# Altium PCB myHItachi.PcbDoc
Units mil, origin at the board's own origin, x right, y up, seen from the top; angles counter-clockwise.
Board outline 5511.81 x 4015.75 mil, 2 copper layers (Top Layer, Bottom Layer); 39 components, 47 nets, 150 pads, 0 vias.
Unrouted connection lines stored in the file: 99.
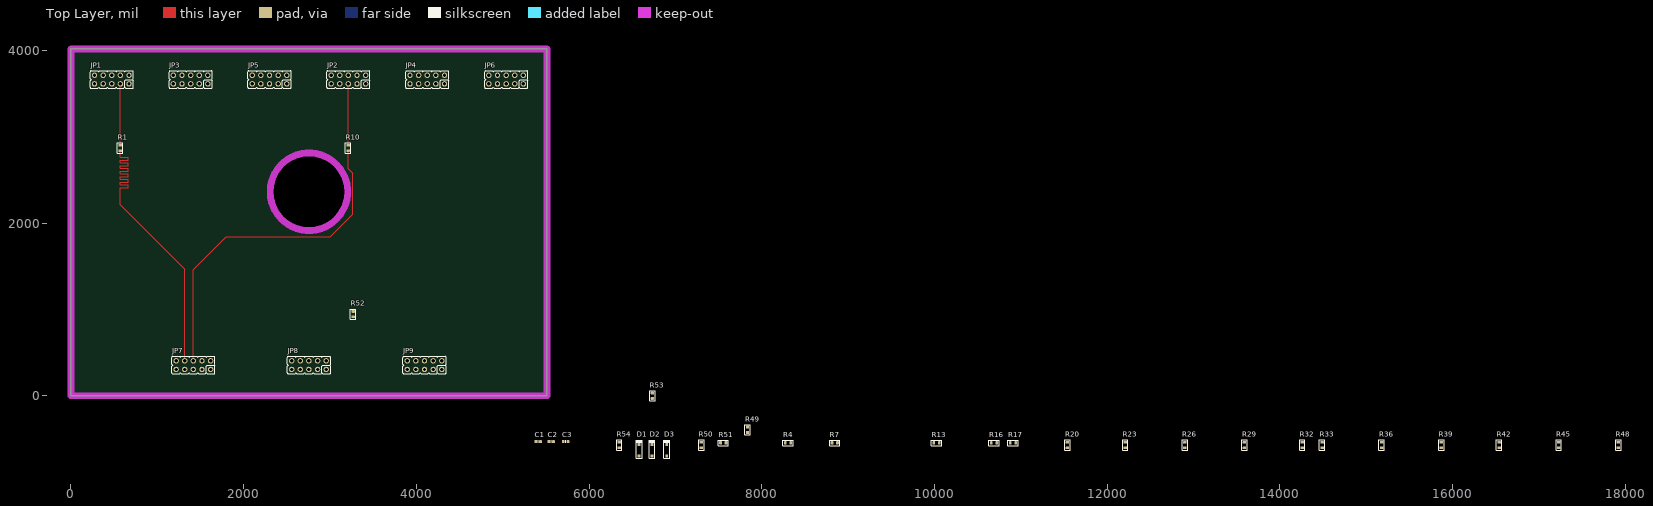
[diagram p0: Top Layer view]
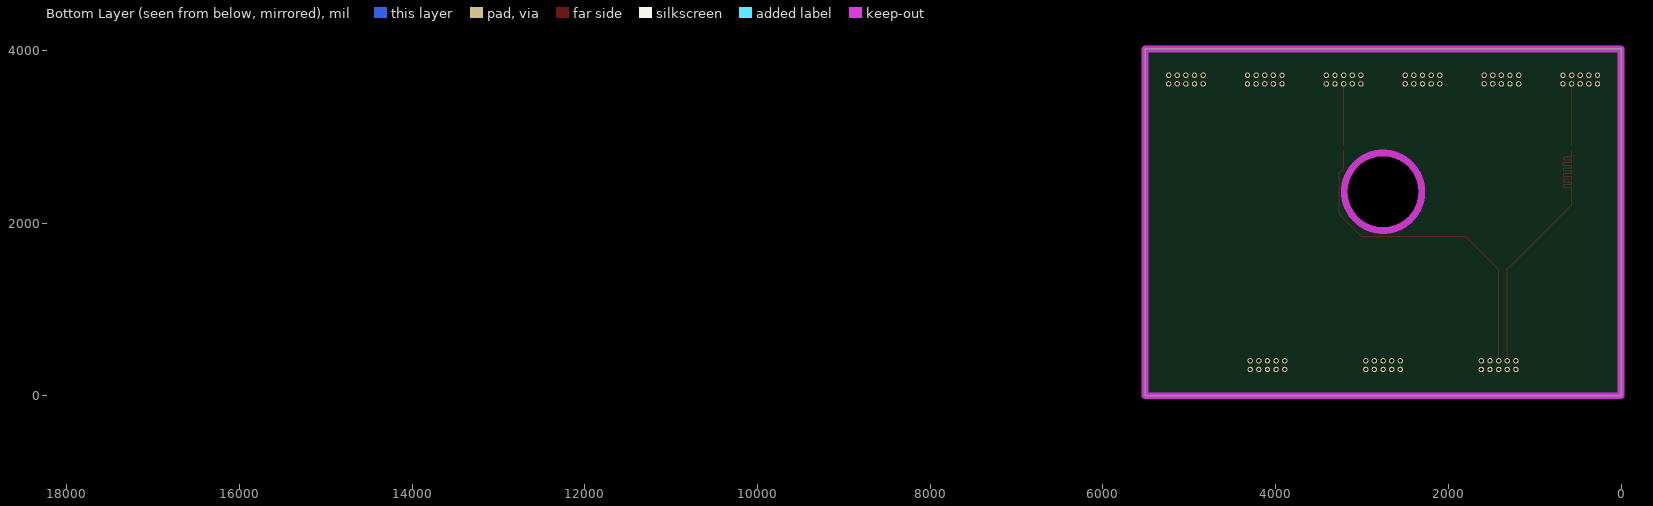
[diagram p1: Bottom Layer view, seen from below]

## Layer stack, top to bottom
Top Solder: solder mask 0.4, Solder Resist, Dk 3.5
Top Layer: signal copper 1.4
Dielectric 1: dielectric 12.6, FR-4, Dk 4.8
Bottom Layer: signal copper 1.4
Bottom Solder: solder mask 0.4, Solder Resist, Dk 3.5

## Board outline
0,0 0,4015.75 5511.81,4015.75 5511.81,0
cut-out: 2307.02,2362.2 ccw(c2755.91,2362.2) 2755.91,1913.32 ccw(c2755.91,2362.2) 3204.79,2362.2 ccw(c2755.91,2362.2) 2755.91,2811.09 ccw(c2755.91,2362.2)

## Design rules (kind name [scope] priority, off if disabled: settings)
Clearance [All] p1: gap=10
MatchedLengths [All] p1: tolerance=78.74 checknetsindiffpair=TRUE checkdiffpairvsdiffpair=TRUE checkothers=TRUE
PolygonConnect [All] p1: connectstyle=Relief reliefconductorwidth=10 reliefentries=4 polygonreliefangle="90 Angle" airgapwidth=10
RoutingVias [All] p1: holewidth=28 width=50 viastyle="Through Hole" minholewidth=28 minwidth=50 maxholewidth=28 maxwidth=50
SolderMaskExpansion [All] p1: expansion=4
Width [All] p1: maxlimit=19.68 minlimit=11.81 preferedwidth=11.81
30 further rules are at their usual default settings.

## Classes and differential pairs
net class P11-P12: P11 P12

## Components (designator, comment, footprint, x,y, rotation, side; value= is the part's Value field where it differs from the comment)
C1 "5AK102KABAA" C0603 5409.69,-531.61 r0 top
C2 "5AK102KABAA" C0603 5559.69,-531.61 r0 top
C3 "5AK102KABAA" C0603 5729.69,-531.61 r0 top
D1 "1N4148_SMD" 1N4148W_V_SMD 6579.69,-631.61 r90 top
D2 "1N4148_SMD" 1N4148W_V_SMD 6729.69,-631.61 r90 top
D3 "1N4148_SMD" 1N4148W_V_SMD 6899.69,-631.61 r90 top
JP1 "SIGNAL OUT 1" HeaderSP_5x2 472.44,3661.42 r180 top
JP2 "SIGNAL OUT 2" HeaderSP_5x2 3212.6,3661.42 r180 top
JP3 "SIGNAL OUT 3" HeaderSP_5x2 1385.83,3661.42 r180 top
JP4 "SIGNAL OUT 4" HeaderSP_5x2 4125.98,3661.42 r180 top
JP5 "SIGNAL OUT 5" HeaderSP_5x2 2299.21,3661.42 r180 top
JP6 "SIGNAL OUT 6" HeaderSP_5x2 5039.37,3661.42 r180 top
JP7 "SIGNAL IN 1" HeaderSP_5x2 1417.32,354.33 r180 top
JP8 "SIGNAL IN 2" HeaderSP_5x2 2755.91,354.33 r180 top
JP9 "SIGNAL IN 3" HeaderSP_5x2 4094.49,354.33 r180 top
R1 "CF1/4W1KJ25" "RM06JTN (0603)" 570,2870 r90 top
R4 "CF1/4W1KJ25" "RM06JTN (0603)" 8304.69,-546.61 r0 top
R7 "CF1/4W1KJ25" "RM06JTN (0603)" 8844.69,-546.61 r0 top
R10 "CF1/4W1KJ25" "RM06JTN (0603)" 3210,2870 r90 top
R13 "CF1/4W1KJ25" "RM06JTN (0603)" 10024.69,-546.61 r0 top
R16 "CF1/4W1KJ25" "RM06JTN (0603)" 10689.69,-546.61 r0 top
R17 "CF1/4W1KJ25" "RM06JTN (0603)" 10909.69,-546.61 r0 top
R20 "CF1/4W1KJ25" "RM06JTN (0603)" 11539.69,-571.61 r90 top
R23 "CF1/4W1KJ25" "RM06JTN (0603)" 12209.69,-571.61 r90 top
R26 "CF1/4W1KJ25" "RM06JTN (0603)" 12899.69,-571.61 r90 top
R29 "CF1/4W1KJ25" "RM06JTN (0603)" 13589.69,-571.61 r90 top
R32 "CF1/4W1KJ25" "RM06JTN (0603)" 14259.69,-571.61 r90 top
R33 "CF1/4W1KJ25" "RM06JTN (0603)" 14489.69,-571.61 r90 top
R36 "CF1/4W1KJ25" "RM06JTN (0603)" 15179.69,-571.61 r90 top
R39 "CF1/4W1KJ25" "RM06JTN (0603)" 15869.69,-571.61 r90 top
R42 "CF1/4W1KJ25" "RM06JTN (0603)" 16539.69,-571.61 r90 top
R45 "CF1/4W1KJ25" "RM06JTN (0603)" 17229.69,-571.61 r90 top
R48 "CF1/4W1KJ25" "RM06JTN (0603)" 17919.69,-571.61 r90 top
R49 "CF1/4W1KJ25" "RM06JTN (0603)" 7834.65,-393.7 r90 top
R50 "CF1/4W1KJ25" "RM06JTN (0603)" 7299.69,-571.61 r90 top
R51 "CF1/4W1KJ25" "RM06JTN (0603)" 7554.69,-546.61 r0 top
R52 "CF1/4W1KJ25" "RM06JTN (0603)" 3267.72,944.88 r90 top
R53 "CF1/4W1KJ25" "RM06JTN (0603)" 6732.28,0 r90 top
R54 "CF1/4W1KJ25" "RM06JTN (0603)" 6349.69,-571.61 r90 top

## Footprints (in the part's own frame and the unit in brackets; to place one, negate y for a bottom-side part, rotate by r counter-clockwise, add the part's x,y. Pads: shape width x height; smd on the part's side, far side on the other; paste and mask are expansions set on the pad)
1N4148W_V_SMD [mm] "SOD-123"
  rrect20% 0.85x0.85 smd mask+0.1: 1(-1.675,0) 2(1.675,0)
  silkscreen extent -2.4,-0.85 3,0.85, body extent -1.85,-0.8 1.85,0.8, height 1.27
C0603 [mm] "Chip Capacitor, Body 1.6x0.8mm, 1608"
  rrect50% 0.8x0.9 smd: 1(-0.7,0) 2(0.7,0)
  silkscreen extent 0,-0.4 0,0.4, body extent -0.8,-0.4 0.8,0.4, height 0.6
HeaderSP_5x2 [mm] "Connector DIP FeMale, 2x5Pin_2.54mm"
  round 1.6 hole 1 mask+0.1: 1(-5.08,1.27) 2(-2.54,1.27) 3(0,1.27) 4(2.54,1.27) 5(5.08,1.27) 6(-5.08,-1.27) 7(-2.54,-1.27) 8(0,-1.27) 9(2.54,-1.27) 10(5.08,-1.27)
  silkscreen extent -6.35,-2.55 6.35,2.55
"RM06JTN (0603)" [mm] "RESISTOR_1/10W_SMD"
  rrect50% 0.8x1 smd mask+0.1: 1(-0.8,0) 2(0.8,0)
  silkscreen extent -1.5,-0.8 1.5,0.8, body extent -0.8,-0.41 0.8,0.41, height 0.45

## Part data
C1 C2 C3: "CAP NPO CAPNTO 1nF 100V 10%"
D1 D2 D3: "Diode HS 500mA 100V SOD123"
JP1 JP2 JP3 JP4 JP5 JP6 JP7 JP8 JP9: library part Con10, "Connector 10"
R1 R4 R7 R10 R13 R16 R17 R20 R23 R26 R29 R32 R33 R36 R39 R42 R45 R48 R49 R50 R51 R52 R53 R54: "RES CF AXIAL-0.3 5% 1/4W 1K"

## Nets (pads, with @x,y where several pads share a name; then routed paths per layer and width w, separated by ;. In a path a pad name is that pad's centre, name@x,y a point inside that pad or via, vN(x,y) a via of type N, cw(c..) or ccw(c..) an arc to the next point about the centre after c; other vN are vias at no path point)
7.2V: C1.1 C2.1 C3.1 JP2.1 JP4.1 JP6.1 JP7.10 JP8.10 JP9.10 R52.1 R53.1 R54.1
GND: JP1.3 JP1.4 JP1.6 JP1.7 JP1.9 JP1.10 JP2.2 JP2.4 JP2.5 JP2.7 JP2.8 JP2.10 JP3.3 JP3.4 JP3.6 JP3.7 JP3.9 JP3.10 JP4.2 JP4.4 JP4.5 JP4.7 JP4.8 JP4.10 JP5.3 JP5.4 JP5.6 JP5.7 JP5.9 JP5.10 JP6.2 JP6.4 JP6.5 JP6.7 JP6.8 JP6.10 JP7.1 JP7.4 JP7.7 JP8.1 JP8.4 JP8.7 JP9.1 JP9.4 JP9.7
NetC1_2: C1.2 D1.2
NetC2_2: C2.2 D2.2
NetC3_2: C3.2 D3.2
NetD1_1: D1.1 R49.1 R52.2
NetD2_1: D2.1 R50.1 R53.2
NetD3_1: D3.1 R51.1 R54.2
NetJP1_1: JP1.1 R49.2
NetJP1_2: JP1.2 R1.2 | length 710.9
  Top Layer w11.81: R1.2 572.44,2903.94 JP1.2
NetJP1_5: JP1.5 R4.2
NetJP1_8: JP1.8 R7.2
NetJP2_3: JP2.3 R10.2 | length 711
  Top Layer w11.81: R10.2 3212.6,2904.09 JP2.3
NetJP2_6: JP2.6 R13.2
NetJP2_9: JP2.9 R16.2
NetJP3_1: JP3.1 R50.2
NetJP3_2: JP3.2 R17.2
NetJP3_5: JP3.5 R20.2
NetJP3_8: JP3.8 R23.2
NetJP4_3: JP4.3 R26.2
NetJP4_6: JP4.6 R29.2
NetJP4_9: JP4.9 R32.2
NetJP5_1: JP5.1 R51.2
NetJP5_2: JP5.2 R33.2
NetJP5_5: JP5.5 R36.2
NetJP5_8: JP5.8 R39.2
NetJP6_3: JP6.3 R42.2
NetJP6_6: JP6.6 R45.2
NetJP6_9: JP6.9 R48.2
P11: JP7.9 R1.1 | length 3874.9
  Top Layer w11.81: R1.1 570,2795.28 570,2759.84 664.27,2759.84 664.27,2728.03 570,2728.03 570,2696.22 664.27,2696.22 664.27,2664.41 570,2664.41 570,2632.6 664.27,2632.6 664.27,2600.79 570,2600.79 570,2568.98 664.27,2568.98 664.27,2537.17 570,2537.17 570,2505.35 664.27,2505.35 664.27,2473.54 570,2473.54 570,2441.73 664.27,2441.73 664.27,2409.92 570,2409.92 570,2378.11 570,2362.2 570,2210 1317.32,1462.68 JP7.9
P12: JP7.8 R10.1 | length 3921.8
  Top Layer w11.81: JP7.8 1417.32,1457.32 1800,1840 3000,1840 3260.86,2100.86 3260.86,2579.14 3210,2630 R10.1
P14: JP7.6 R4.1
P15: JP7.5 R13.1
P17: JP7.3 R7.1
P18: JP7.2 R16.1
P21: JP8.9 R17.1
P22: JP8.8 R26.1
P24: JP8.6 R20.1
P25: JP8.5 R29.1
P27: JP8.3 R23.1
P28: JP8.2 R32.1
P31: JP9.9 R33.1
P32: JP9.8 R42.1
P34: JP9.6 R36.1
P35: JP9.5 R45.1
P37: JP9.3 R39.1
P38: JP9.2 R48.1

## Keep-outs
Keep-Out Layer:
  circle w78.74: c2755.91,2362.2 r448.89
  lines w78.74: 0,0 0,4015.75 5511.81,4015.75 5511.81,0 0,0

## Dimensions
4294.49,304.33 to 5511.81,0 on Mechanical 10
4294.49,304.33 to 5511.81,0 on Mechanical 10
0,0 to 1217.32,304.33 on Mechanical 10
0,0 to 1217.32,304.33 on Mechanical 10
5511.81,4015.75 to 5239.37,3711.42 on Mechanical 10
0,4015.75 to 272.44,3711.42 on Mechanical 10
5511.81,4015.75 to 5239.37,3711.42 on Mechanical 10
0,4015.75 to 272.44,3711.42 on Mechanical 10
0,4015.75 to 0,0 on Mechanical 10
0,4015.75 to 5511.81,4015.75 on Mechanical 10
2307.02,2362.2 to 0,4015.75 on Mechanical 10
2755.91,2811.09 to 0,4015.75 on Mechanical 10
2755.91,2362.2 to 2740,2340 on Mechanical 10

## Text inside footprints (layer, text, board x,y; h text height)
C1: Mechanical 1 "C?" at 5409.69,-531.61 h19.68
C2: Mechanical 1 "C?" at 5559.69,-531.61 h19.68
C3: Mechanical 1 "C?" at 5729.69,-531.61 h19.68
JP1: Mechanical 1 "6" at 679.13,3727.17 h47.24 r180; Mechanical 1 "10" at 293.31,3727.17 h47.24 r180; Mechanical 1 "5" at 283.46,3625.98 h47.24 r180; Mechanical 1 "1" at 679.13,3627.17 h47.24 r180
JP2: Mechanical 1 "6" at 3419.29,3727.17 h47.24 r180; Mechanical 1 "10" at 3033.46,3727.17 h47.24 r180; Mechanical 1 "5" at 3023.62,3625.98 h47.24 r180; Mechanical 1 "1" at 3419.29,3627.17 h47.24 r180
JP3: Mechanical 1 "6" at 1592.52,3727.17 h47.24 r180; Mechanical 1 "10" at 1206.69,3727.17 h47.24 r180; Mechanical 1 "5" at 1196.85,3625.98 h47.24 r180; Mechanical 1 "1" at 1592.52,3627.17 h47.24 r180
JP4: Mechanical 1 "6" at 4332.68,3727.17 h47.24 r180; Mechanical 1 "10" at 3946.85,3727.17 h47.24 r180; Mechanical 1 "5" at 3937.01,3625.98 h47.24 r180; Mechanical 1 "1" at 4332.68,3627.17 h47.24 r180
JP5: Mechanical 1 "6" at 2505.91,3727.17 h47.24 r180; Mechanical 1 "10" at 2120.08,3727.17 h47.24 r180; Mechanical 1 "5" at 2110.24,3625.98 h47.24 r180; Mechanical 1 "1" at 2505.91,3627.17 h47.24 r180
JP6: Mechanical 1 "6" at 5246.06,3727.17 h47.24 r180; Mechanical 1 "10" at 4860.24,3727.17 h47.24 r180; Mechanical 1 "5" at 4850.39,3625.98 h47.24 r180; Mechanical 1 "1" at 5246.06,3627.17 h47.24 r180
JP7: Mechanical 1 "6" at 1624.02,420.08 h47.24 r180; Mechanical 1 "10" at 1238.19,420.08 h47.24 r180; Mechanical 1 "5" at 1228.35,318.9 h47.24 r180; Mechanical 1 "1" at 1624.02,320.08 h47.24 r180
JP8: Mechanical 1 "6" at 2962.6,420.08 h47.24 r180; Mechanical 1 "10" at 2576.77,420.08 h47.24 r180; Mechanical 1 "5" at 2566.93,318.9 h47.24 r180; Mechanical 1 "1" at 2962.6,320.08 h47.24 r180
JP9: Mechanical 1 "6" at 4301.18,420.08 h47.24 r180; Mechanical 1 "10" at 3915.35,420.08 h47.24 r180; Mechanical 1 "5" at 3905.51,318.9 h47.24 r180; Mechanical 1 "1" at 4301.18,320.08 h47.24 r180
R1: Mechanical 1 "R?" at 570,2870 h19.68 r90
R4: Mechanical 1 "R?" at 8304.69,-546.61 h19.68
R7: Mechanical 1 "R?" at 8844.69,-546.61 h19.68
R10: Mechanical 1 "R?" at 3210,2870 h19.68 r90
R13: Mechanical 1 "R?" at 10024.69,-546.61 h19.68
R16: Mechanical 1 "R?" at 10689.69,-546.61 h19.68
R17: Mechanical 1 "R?" at 10909.69,-546.61 h19.68
R20: Mechanical 1 "R?" at 11539.69,-571.61 h19.68 r90
R23: Mechanical 1 "R?" at 12209.69,-571.61 h19.68 r90
R26: Mechanical 1 "R?" at 12899.69,-571.61 h19.68 r90
R29: Mechanical 1 "R?" at 13589.69,-571.61 h19.68 r90
R32: Mechanical 1 "R?" at 14259.69,-571.61 h19.68 r90
R33: Mechanical 1 "R?" at 14489.69,-571.61 h19.68 r90
R36: Mechanical 1 "R?" at 15179.69,-571.61 h19.68 r90
R39: Mechanical 1 "R?" at 15869.69,-571.61 h19.68 r90
R42: Mechanical 1 "R?" at 16539.69,-571.61 h19.68 r90
R45: Mechanical 1 "R?" at 17229.69,-571.61 h19.68 r90
R48: Mechanical 1 "R?" at 17919.69,-571.61 h19.68 r90
R49: Mechanical 1 "R?" at 7834.65,-393.7 h19.68 r90
R50: Mechanical 1 "R?" at 7299.69,-571.61 h19.68 r90
R51: Mechanical 1 "R?" at 7554.69,-546.61 h19.68
R52: Mechanical 1 "R?" at 3267.72,944.88 h19.68 r90
R53: Mechanical 1 "R?" at 6732.28,0 h19.68 r90
R54: Mechanical 1 "R?" at 6349.69,-571.61 h19.68 r90